# Altium PCB Smart-Car.PcbDoc (part 1 of 2)
Units mil, origin at the board's own origin, x right, y up, seen from the top; angles counter-clockwise.
Board outline 3864.45 x 1894.79 mil, 4 copper layers (Top Layer, Signal Layer 1, GND, Bottom Layer), stack 36.221 mil thick; 161 components, 132 nets, 578 pads, 430 vias.
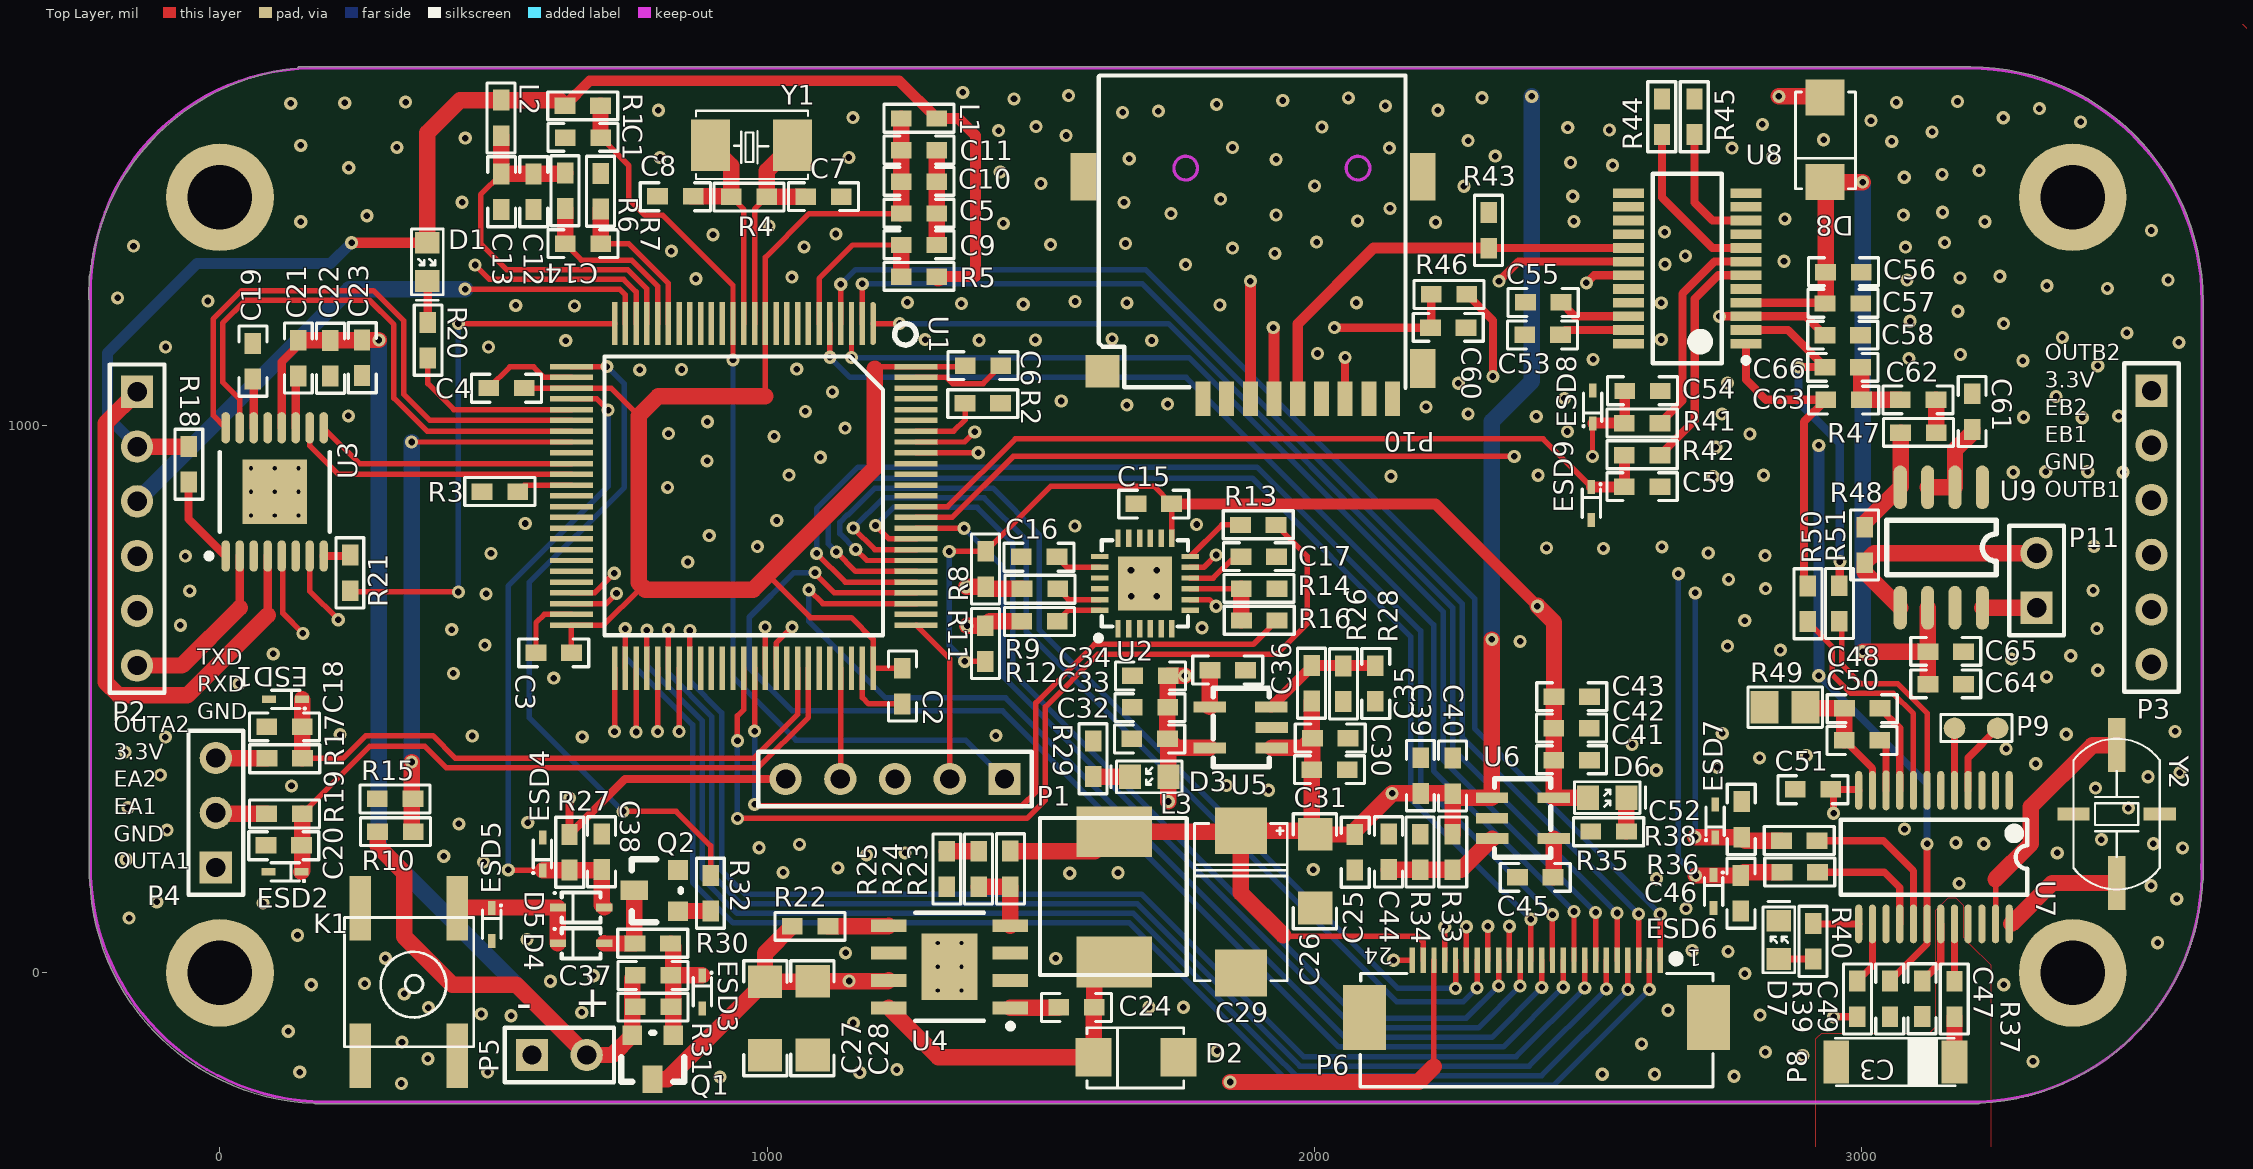
[diagram p0: Top Layer view]
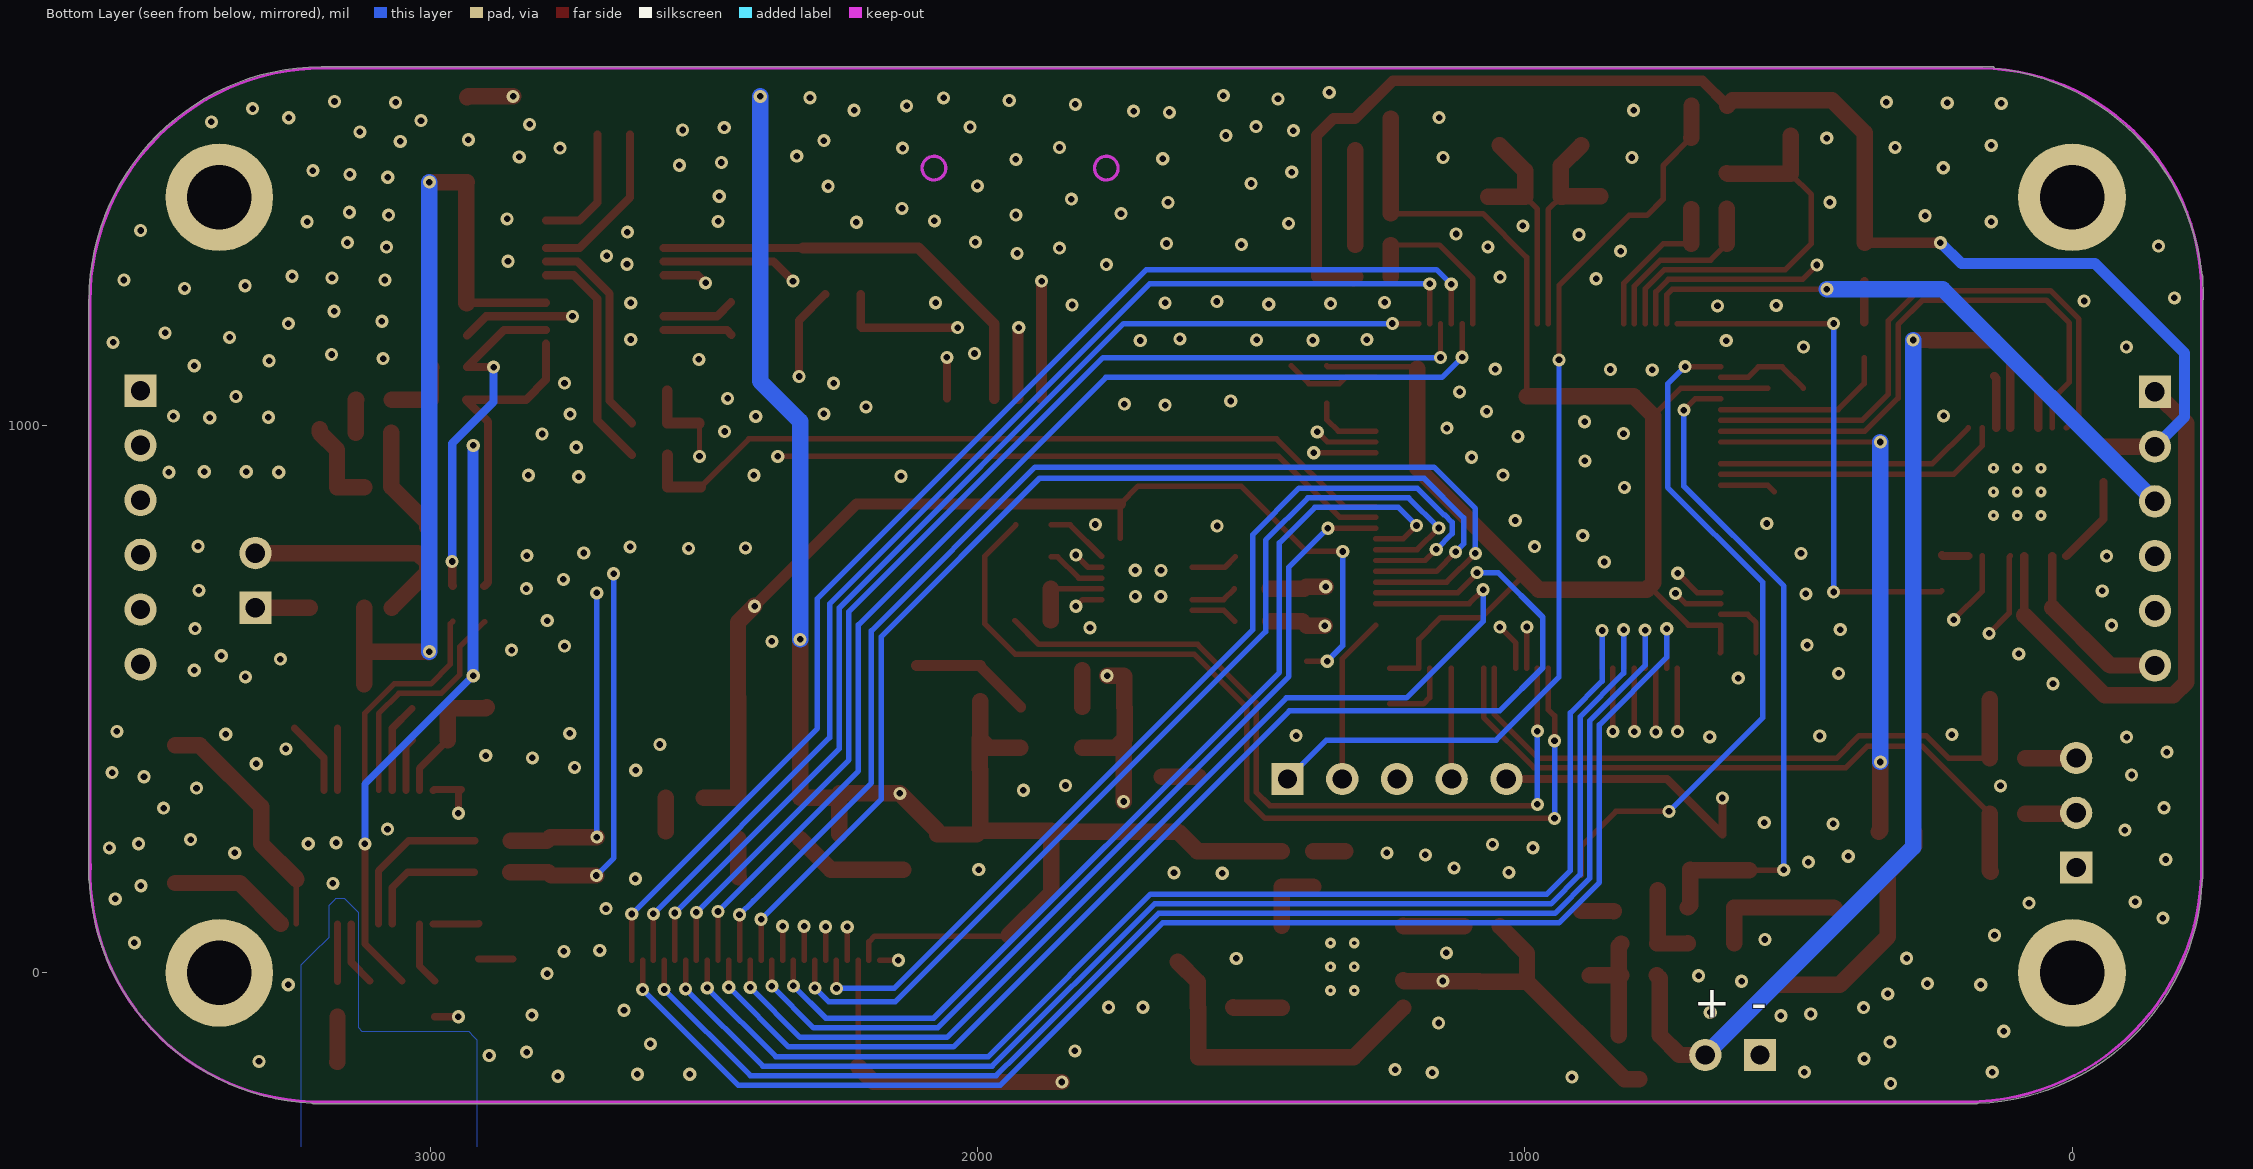
[diagram p1: Bottom Layer view, seen from below]
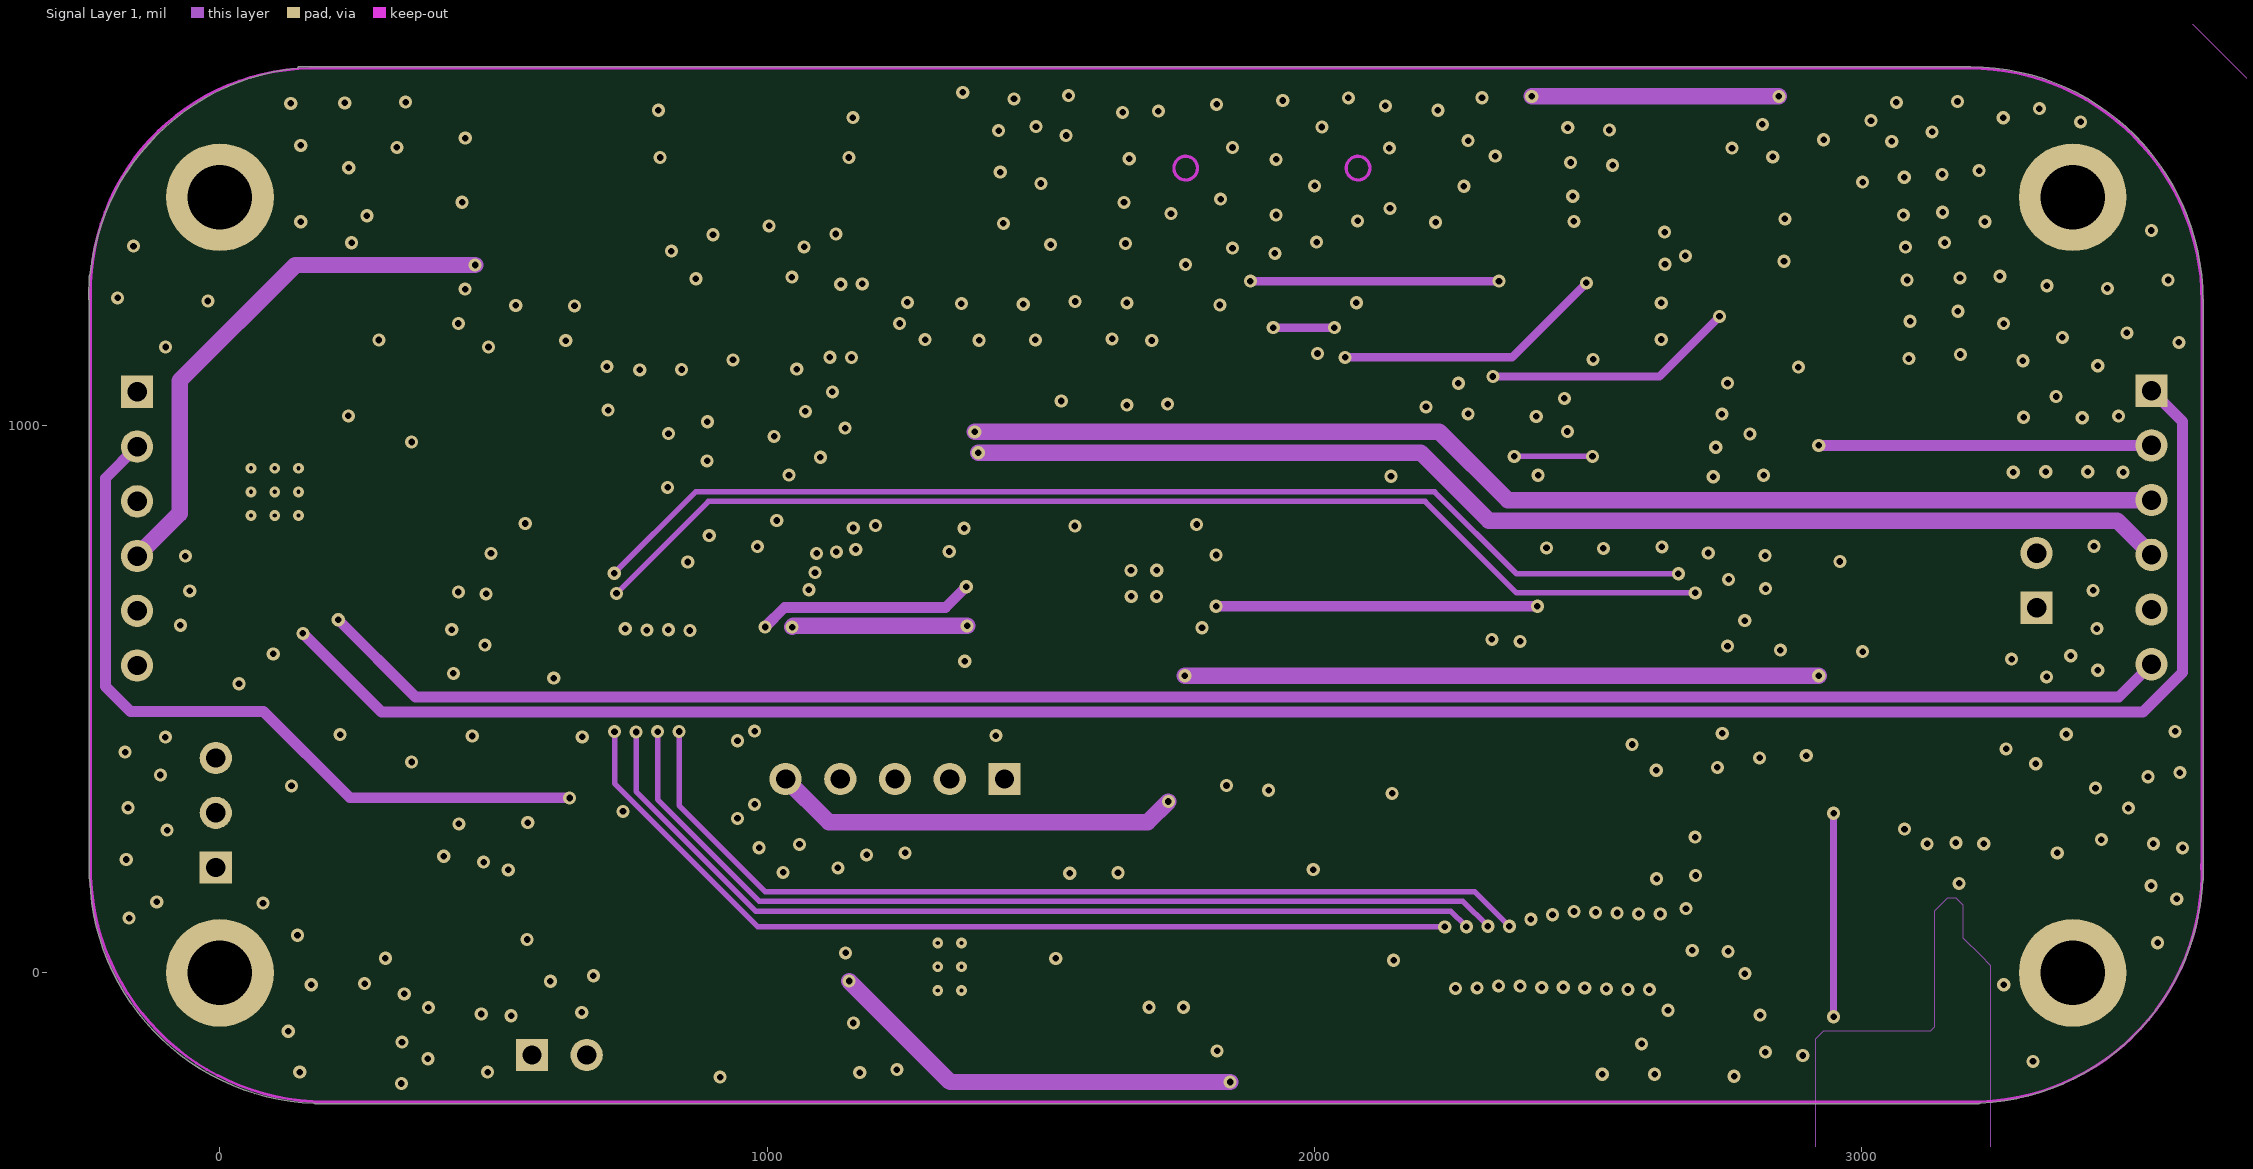
[diagram p2: Signal Layer 1]
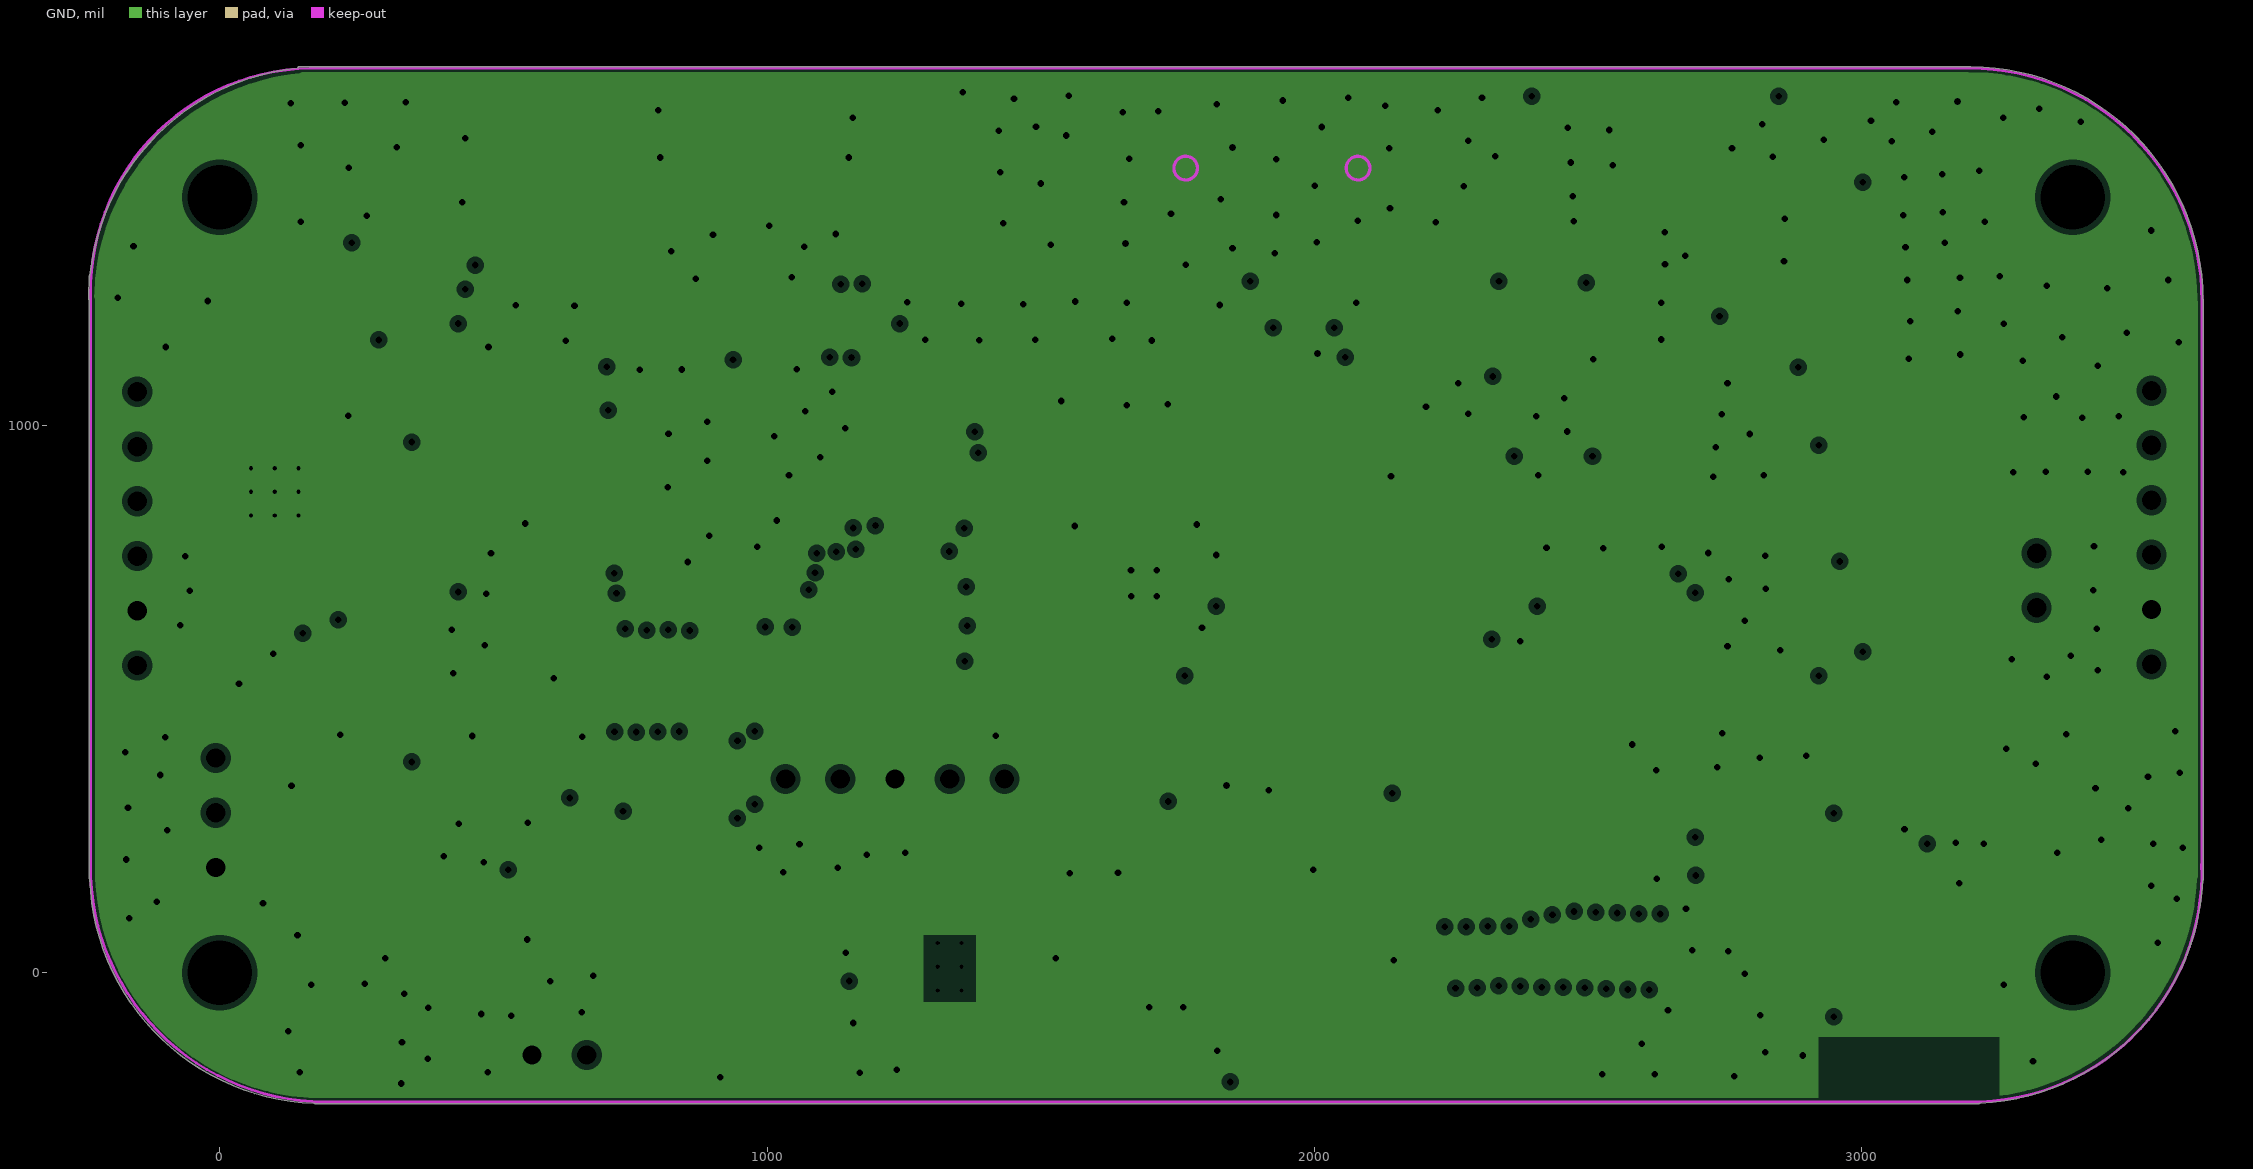
[diagram p3: GND, clearances drawn from the general rule]

## Layer stack, top to bottom
Top Solder: solder mask 1.575, Solder Resist, Dk 3.5
Top Layer: signal copper 7.874
Dielectric 1: core 1.575, FR-4, Dk 4.2
Signal Layer 1: signal copper 7.874
Dielectric 2: core 1.575, Dk 4.2
GND: plane copper 7.874, net GND
Dielectric 3: core 1.575, Dk 4.2
Bottom Layer: signal copper 7.874
Bottom Solder: solder mask 1.575, Solder Resist, Dk 3.5

## Board outline
-238.74,1229.75 cw(c-237.37,1231.87) -239.89,1231.88 cw(c185.73,1230.19) -238.74,1261.52 -238.74,1272.28 cw(c-236.22,1272.28) -237.59,1274.39 cw(c185.73,1230.19) 142.53,1653.61 cw(c145.05,1653.54) 145.05,1656.06 3197.51,1656.06 cw(c3197.51,1653.54) 3198.91,1655.63 cw(c3199.78,1653.28) 3199.79,1655.79 cw(c3198.1,1230.17) 3623.72,1230.88 cw(c3622.05,1229.01) 3624.56,1229.01 3624.56,171.54 cw(c3622.05,171.54) 3623.06,169.24 cw(c3197.83,187.36) 3216.19,-237.86 cw(c3214.28,-236.22) 3214.28,-238.74 173.28,-238.74 cw(c173.28,-236.22) 172.14,-238.46 cw(c187.46,186.88) -237.88,171.39 cw(c-236.22,173.28) -238.74,173.28

## Design rules (kind name [scope] priority, off if disabled: settings)
AssemblyTestPointUsage [All] p0: scope1count=1 scope1_0_kind=Board scope1_0_value=Board scope2count=1 scope2_0_kind=Board scope2_0_value=Board commentlength=0
AssemblyTestpoint [All] p0: scope1count=1 scope1_0_kind=Board scope1_0_value=Board scope2count=1 scope2_0_kind=Board scope2_0_value=Board commentlength=0
Clearance PVCC [All] p0: scope1count=1 scope1_0_kind=Net scope1_0_value=PVCC scope2count=1 scope2_0_kind=Net scope2_0_value=GND-WAVE commentlength=0 gap=20
Clearance [All] p0: scope1count=1 scope1_0_kind=Board scope1_0_value=Board scope2count=1 scope2_0_kind=Board scope2_0_value=Board commentlength=0 gap=7.5
Clearance PVCC [InNet('PVCC') vs InNet('GND-WAVE')] p1: gap=20 ignorepadtopadclearanceinfootprint=FALSE except(0: Arc-Hole Track-Hole SMDPad-Hole THPad-Hole Via-Hole Fill-Hole Poly-Hole Region-Hole Text-Hole)
Clearance [All] p2: gap=7.5 ignorepadtopadclearanceinfootprint=FALSE except(0: Arc-Hole Track-Hole SMDPad-Hole THPad-Hole Via-Hole Fill-Hole Poly-Hole Region-Hole Text-Hole)
ComponentClearance [All] p0: scope1count=1 scope1_0_kind=Board scope1_0_value=Board scope2count=1 scope2_0_kind=Board scope2_0_value=Board commentlength=0 gap=10 collisioncheckmode=3
DiffPairsRouting [All] p0: scope1count=1 scope1_0_kind=Board scope1_0_value=Board scope2count=1 scope2_0_kind=Board scope2_0_value=Board commentlength=0
FabricationTestPointUsage [All] p0: scope1count=1 scope1_0_kind=Board scope1_0_value=Board scope2count=1 scope2_0_kind=Board scope2_0_value=Board commentlength=0 valid=0 allowmultiple=FALSE
FabricationTestpoint [All] p0: scope1count=1 scope1_0_kind=Board scope1_0_value=Board scope2count=1 scope2_0_kind=Board scope2_0_value=Board commentlength=0 side=3 testpointundercomponent=TRUE minsize=40 maxsize=100 preferedsize=60 minholesize=0 maxholesize=40 preferedholesize=32 testpointgrid=1
FanoutControl Fanout_BGA [All] p0 off: scope1count=1 scope1_0_kind=Board scope1_0_value=Board scope2count=1 scope2_0_kind=Board scope2_0_value=Board commentlength=69 // Protel DXP Scope 1 Expression Was: IsBGA   Fanout_BGA (Default Rule)
FanoutControl Fanout_LCC [All] p0 off: scope1count=1 scope1_0_kind=Board scope1_0_value=Board scope2count=1 scope2_0_kind=Board scope2_0_value=Board commentlength=69 // Protel DXP Scope 1 Expression Was: IsLCC   Fanout_LCC (Default Rule)
FanoutControl Fanout_SOIC [All] p0 off: scope1count=1 scope1_0_kind=Board scope1_0_value=Board scope2count=1 scope2_0_kind=Board scope2_0_value=Board commentlength=71 // Protel DXP Scope 1 Expression Was: IsSOIC   Fanout_SOIC (Default Rule)
FanoutControl Fanout_Small [All] p0 off: scope1count=1 scope1_0_kind=Board scope1_0_value=Board scope2count=1 scope2_0_kind=Board scope2_0_value=Board commentlength=84 // Protel DXP Scope 1 Expression Was: (CompPinCount < 5)   Fanout_Small (Default Rule)
FanoutControl Fanout_Default [All] p0: scope1count=1 scope1_0_kind=Board scope1_0_value=Board scope2count=1 scope2_0_kind=Board scope2_0_value=Board commentlength=30 // Fanout_Default (Default Rule)
Height [All] p0: scope1count=1 scope1_0_kind=Board scope1_0_value=Board scope2count=1 scope2_0_kind=Board scope2_0_value=Board commentlength=0
HoleSize [All] p0: scope1count=1 scope1_0_kind=Board scope1_0_value=Board scope2count=1 scope2_0_kind=Board scope2_0_value=Board commentlength=0 absolutevalues=TRUE maxlimit=500 minlimit=1 maxpercent=80.000 minpercent=20.000
HoleSize [All] p1: absolutevalues=TRUE maxlimit=500 minlimit=1 maxpercent=80.000 minpercent=20.000
HoleToHoleClearance [All] p0: scope1count=1 scope1_0_kind=Board scope1_0_value=Board scope2count=1 scope2_0_kind=Board scope2_0_value=Board commentlength=0
LayerPairs [All] p0: scope1count=1 scope1_0_kind=Board scope1_0_value=Board scope2count=1 scope2_0_kind=Board scope2_0_value=Board commentlength=0 enforce=TRUE
MinimumSolderMaskSliver [All] p0: scope1count=1 scope1_0_kind=Board scope1_0_value=Board scope2count=1 scope2_0_kind=Board scope2_0_value=Board commentlength=0
MinimumSolderMaskSliver [All] p1: minsoldermaskwidth=0
NetAntennae [All] p0: scope1count=1 scope1_0_kind=Board scope1_0_value=Board scope2count=1 scope2_0_kind=Board scope2_0_value=Board commentlength=0
PasteMaskExpansion [All] p0: scope1count=1 scope1_0_kind=Board scope1_0_value=Board scope2count=1 scope2_0_kind=Board scope2_0_value=Board commentlength=0 expansion=0
PlaneClearance [All] p0: scope1count=1 scope1_0_kind=Board scope1_0_value=Board scope2count=1 scope2_0_kind=Board scope2_0_value=Board commentlength=0 clearance=10
PlaneClearance [All] p1: clearance=10
PlaneConnect [All] p0: scope1count=1 scope1_0_kind=Board scope1_0_value=Board scope2count=1 scope2_0_kind=Board scope2_0_value=Board commentlength=0 planeconnectstyle=Relief reliefexpansion=20 reliefentries=4 reliefconductorwidth=10 reliefairgap=10
PlaneConnect [All] p1: planeconnectstyle=Relief reliefexpansion=20 reliefentries=4 reliefconductorwidth=10 reliefairgap=10
PolygonConnect Via [All] p0 off: scope1count=1 scope1_0_kind=Board scope1_0_value=Board scope2count=1 scope2_0_kind=Board scope2_0_value=Board commentlength=44 connectstyle=Direct reliefconductorwidth=10 reliefentries=4 polygonreliefangle="90 Angle" // Protel DXP Scope 1 Expression Was: IsVia
PolygonConnect [All] p0: scope1count=1 scope1_0_kind=Board scope1_0_value=Board scope2count=1 scope2_0_kind=Board scope2_0_value=Board commentlength=0 connectstyle=Relief reliefconductorwidth=10 reliefentries=4 polygonreliefangle="90 Angle"
PolygonConnect Via [IsVia] p1: connectstyle=Direct reliefconductorwidth=10 reliefentries=4 polygonreliefangle="90 Angle" airgapwidth=10
PolygonConnect [All] p2: connectstyle=Relief reliefconductorwidth=10 reliefentries=4 polygonreliefangle="90 Angle" airgapwidth=10
RoutingCorners [All] p0: scope1count=1 scope1_0_kind=Board scope1_0_value=Board scope2count=1 scope2_0_kind=Board scope2_0_value=Board commentlength=0 cornerstyle=45-Degree minsetback=100 maxsetback=100
RoutingLayers [All] p0: scope1count=1 scope1_0_kind=Board scope1_0_value=Board scope2count=1 scope2_0_kind=Board scope2_0_value=Board commentlength=0 top layer=Automatic mid layer 1=Automatic bottom layer=Automatic
RoutingPriority [All] p0: scope1count=1 scope1_0_kind=Board scope1_0_value=Board scope2count=1 scope2_0_kind=Board scope2_0_value=Board commentlength=0
RoutingTopology [All] p0: scope1count=1 scope1_0_kind=Board scope1_0_value=Board scope2count=1 scope2_0_kind=Board scope2_0_value=Board commentlength=0 topology=Shortest
RoutingVias [All] p0: scope1count=1 scope1_0_kind=Board scope1_0_value=Board scope2count=1 scope2_0_kind=Board scope2_0_value=Board commentlength=0 holewidth=12 width=24 viastyle="Through Hole" minholewidth=12 minwidth=24 maxholewidth=500 maxwidth=1000
RoutingVias [All] p1: holewidth=12 width=24 viastyle="Through Hole" minholewidth=12 minwidth=24 maxholewidth=500 maxwidth=1000
ShortCircuit [All] p0: scope1count=1 scope1_0_kind=Board scope1_0_value=Board scope2count=1 scope2_0_kind=Board scope2_0_value=Board commentlength=0 allowed=TRUE
ShortCircuit [All] p1: allowed=TRUE
SilkToBoardRegionClearance [All] p0: scope1count=1 scope1_0_kind=Board scope1_0_value=Board scope2count=1 scope2_0_kind=Board scope2_0_value=Board commentlength=0
SilkToSilkClearance [All] p0: scope1count=1 scope1_0_kind=Board scope1_0_value=Board scope2count=1 scope2_0_kind=Board scope2_0_value=Board commentlength=0
SilkToSilkClearance [All] p1: silktosilkclearance=0
SilkToSolderMaskClearance [All] p0 off: scope1count=1 scope1_0_kind=Board scope1_0_value=Board scope2count=1 scope2_0_kind=Board scope2_0_value=Board commentlength=44 // Protel DXP Scope 1 Expression Was: IsPad
SilkToSolderMaskClearance [IsPad] p1: minsilkscreentomaskgap=0 clearancetoexposedcopper=TRUE
SolderMaskExpansion [All] p0: scope1count=1 scope1_0_kind=Board scope1_0_value=Board scope2count=1 scope2_0_kind=Board scope2_0_value=Board commentlength=0 expansion=4
SolderMaskExpansion [All] p1: expansion=4 istentingtop=FALSE
UnRoutedNet [All] p0: scope1count=1 scope1_0_kind=Board scope1_0_value=Board scope2count=1 scope2_0_kind=Board scope2_0_value=Board commentlength=0
UnpouredPolygon [All] p0: scope1count=1 scope1_0_kind=Board scope1_0_value=Board scope2count=1 scope2_0_kind=Board scope2_0_value=Board commentlength=0
Width [All] p0: scope1count=1 scope1_0_kind=Board scope1_0_value=Board scope2count=1 scope2_0_kind=Board scope2_0_value=Board commentlength=0 maxlimit=100 minlimit=9 preferedwidth=10
Width [All] p1: maxlimit=100 minlimit=9 preferedwidth=10
23 further rules are at their usual default settings.

## Classes and differential pairs
component class Voice: C53 C54 C55 C56 C57 C58 C59 C60 C61 C62 C63 C64 C65 C66 D8 ESD8 ESD9 P10 P11 R41 R42 R43 R44 R45 R46 R47 R48 R50 R51 U8 U9
component class KT1025A: C46 C47 C48 C49 C50 C51 C52 D7 ESD6 ESD7 P8 P9 R36 R37 R38 R39 R40 R49 U7 Y2
component class Extend: P6
component class MCU: C1 C2 C3 C4 C5 C6 C7 C8 C9 C10 C11 C12 C13 C14 L1 L2 P1 R1 R2 R3 R4 R5 R6 R7 U1 Y1
component class Module: C15 C16 C17 C18 C19 C20 C21 C22 C23 D1 ESD1 ESD2 P2 P3 P4 R8 R9 R10 R11 R12 R13 R14 R15 R16 R17 R18 R19 R20 R21 U2 U3
component class Power: C24 C25 C26 C27 C28 C29 C30 C31 C32 C33 C34 C35 C36 C37 C38 C39 C40 C41 C42 C43 C44 C45 D2 D3 D4 D5 D6 ESD3 ESD4 ESD5 K1 L3 P5 Q1 Q2 R22 R23 R24 R25 R26 R27 R28 R29 R30 R31 R32 R33 R34 R35 U4 U5 U6

## Components (designator, comment, footprint, x,y, rotation, side; value= is the part's Value field where it differs from the comment)
C1 "0.1μF" 0603C 663.48,1526.28 r180 top
C2 "0.1μF" 0603C 1246.98,524.08 r90 top
C3 "0.1μF" 0603C 610.08,585.28 r0 top
C4 "0.1μF" 0603C 523.68,1068.78 r0 top
C5 "0.1μF" 0603C 1277.58,1387.68 r180 top
C6 "0.1μF" 0603C 1394.38,1109.18 r180 top
C7 "20pF" 0603C 1102.88,1418.08 r180 top
C8 "20pF" 0603C 832.28,1418.88 r0 top
C9 "0.1μF" 0603C 1277.58,1330.18 r180 top
C10 "10μF" 0603C 1277.58,1446.08 r180 top
C11 "0.1μF" 0603C 1277.58,1503.38 r180 top
C12 "10μF" 0603C 572.98,1427.58 r90 top
C13 "0.1μF" 0603C 514.28,1427.58 r90 top
C14 "0.1μF" 0603C 663.58,1332.08 r180 top
C15 "0.1μF" 0603C 1706.48,857.04 r0 top
C16 "10μF" 0603C 1496.98,760.14 r0 top
C17 "0.1μF" 0603C 1898.18,760.24 r180 top
C18 "39pF" 0603C 117.9,450.1 r0 top
C19 "2.2μF" 0603C 59.8,1117.89 r90 top
C20 "39pF" 0603C 116.6,232.9 r0 top
C21 "10nF" 0603C 142.8,1123.5 r90 top
C22 "10μF" 0603C 201.4,1123.29 r90 top
C23 "0.1μF" 0603C 259.6,1124.09 r90 top
C24 "0.01μF" 0603C 1565.38,-62.92 r0 top
C25 "0.1μF" 0603C 2074.18,220.38 r90 top
C26 "10μF" 1206C 2001.28,118.63 r90 top
C27 "4.7μF" 1206C 996.08,-16.02 r270 top
C28 "4.7μF" 1206C 1083.08,-149.87 r90 top
C29 "100μF" D7343C 1865.68,260.01 r270 top
C30 "10μF" 0603C 2028.98,428.58 r180 top
C31 "470pf" 0603C 2027.78,370.98 r180 top
C32 "10μF" 0603C 1698.98,427.78 r0 top
C33 "10μF" 0603C 1699.68,485.18 r0 top
C34 "470pf" 0603C 1700.38,542.98 r0 top
C35 "0.1μF" 0603C 2111.58,528.88 r90 top
C36 "0.01μF" 0603C 1841.6,552.9 r180 top
C37 "100nf" 0603C 791.38,-4.42 r0 top
C38 "10nF" 0603C 697.78,221.38 r270 top
C39 "10μF" 0603C 2194.28,360.48 r270 top
C40 "470pf" 0603C 2252.88,359.98 r270 top
C41 "10μF" 0603C 2470.08,388.88 r180 top
C42 "10μF" 0603C 2469.88,446.88 r180 top
C43 "470pf" 0603C 2470.38,504.38 r180 top
C44 "0.1μF" 0603C 2135.98,221.18 r270 top
C45 "0.01μF" 0603C 2403.78,175.08 r0 top
C46 "39pF" 0603C 2779.1,145.5 r90 top
C47 "1μF" 0603C 3110.8,-47.2 r270 top
C48 "1μF" 0603C 3001.2,483.3 r0 top
C49 "1μF" 0603C 3052,-47.6 r270 top
C50 "1μF" 0603C 3000.8,425.3 r0 top
C51 "1μF" 0603C 2911.2,335.2 r0 top
C52 "39pF" 0603C 2780.7,280.5 r270 top
C53 "1μF" 0603C 2417.1,1166.1 r0 top
C54 "39pF" 0603C 2599.7,1063.4 r180 top
C55 "1μF" 0603C 2418.1,1225.5 r0 top
C56 "0.1μF" 0603C 2966.8,1280.7 r180 top
C57 "1μF" 0603C 2965.9,1223.2 r180 top
C58 "1μF" 0603C 2965.6,1165 r180 top
C59 "39pF" 0603C 2599,888.1 r180 top
C60 "1μF" 0603C 2244.7,1179.1 r180 top
C61 "1μF" 0603C 3202.6,1025.7 r270 top
C62 "0.15μF" 0603C 3103.3,1047.6 r0 top
C63 "1μF" 0603C 2967.2,1047.2 r0 top
C64 "1μF" 0603C 3153.9,527.6 r180 top
C65 "10μF" 0603C 3153.9,587 r180 top
C66 "1μF" 0603C 2965.8,1107 r0 top
D1 "蓝色LED" 0603LED 379.2,1334.3 r270 top
D2 "1N5822 SS34" SMA-small 1751.32,-154.3 r180 top
D3 "绿色LED" 0603LED 1733.28,358.38 r180 top
D4 "1N4148" SOD323 659.88,53.78 r180 top
D5 "1N4148" SOD323 660.08,119.48 r180 top
D6 "红色LED" 0603LED 2500.28,320.38 r0 top
D7 "蓝色LED" 0603LED 2848.9,25.3 r90 top
D8 "1N5819 SS14" SMA-small 2933.1,1599.8 r270 top
ESD1 "ESD5Z5.0T1G" SOD523 89.94,500.2 r0 top
ESD2 "ESD5Z5.0T1G" SOD523 88.74,184.9 r0 top
ESD3 "ESD5Z6.0T1G" SOD523 881.28,-64.78 r90 top
ESD4 "ESD5Z3.3T1G" SOD523 589.68,247.53 r270 top
ESD5 "ESD5Z6.0T1G" SOD523 496.48,58.28 r90 top
ESD6 "ESD5Z5.0T1G" SOD523 2729.4,118.44 r90 top
ESD7 "ESD5Z5.0T1G" SOD523 2732.7,307.66 r270 top
ESD8 "ESD5Z5.0T1G" SOD523 2508.8,1064.2 r270 top
ESD9 "ESD5Z5.0T1G" SOD523 2506,827.8 r90 top
K1 "轻触按键贴片 6*6*5" "轻触按键贴片 6*6*5" 425.37,-151.47 r270 top
L1 "BEAD-220/100MHZ" 0603R 1277.58,1561.28 r180 top
L2 "BEAD-220/100MHZ" 0603R 514.28,1562.38 r270 top
L3 "10μH_4A_7*7*3" "7*7*3mm - 06030" 1633.98,19.98 r90 top
P1 "Header 5" HDR1X5 1433.68,354.38 r180 top
P2 "Header 6" HDR1X6 -151.4,1061.7 r270 top
P3 "Header 6" HDR1X6 3529.9,1064 r270 top
P4 "Header 3" HDR1X3 -7.58,192.58 r90 top
P5 "Header 2" HDR1X2 570.28,-150.12 r0 top
P6 "FPC-24P-0.5mm" FPC24-0.5mm 2631.99,23 r180 top locked
P8 "CA-C03" ANT 3170.14,-162.8 r180 top
P9 "预留测试口-2Pin" "预留测试口 2Pin" 3169.8,447 r0 top
P10 "Mini SD" TF-tan 1796.39,1049.4 r180 top locked
P11 "Header 2" HDR1X2 3319.8,667.1 r90 top
Q1 "SI2323DS" SOT-23 828.58,-114.12 r180 top
Q2 "MMBT3904" SOT-23 837.18,112.88 r90 top
R1 "10K ohm" 0603R 662.98,1584.98 r0 top
R2 "10K ohm" 0603R 1394.1,1040.7 r0 top
R3 "10K ohm" 0603R 511.6,879.1 r180 top
R4 "1M ohm" 0603R 966.78,1418.08 r0 top
R5 "0 ohm" 0603R 1277.58,1272.38 r180 top
R6 "0 ohm" 0603R 631.08,1429.18 r270 top
R7 "0 ohm" 0603R 695.88,1428.48 r270 top
R8 "4.7K ohm" 0603R 1399.58,738.14 r270 top
R9 "120ohm" 0603R 1498.48,701.64 r0 top
R10 "200K ohm" 0603R 320.7,257.6 r180 top
R11 "4.7K ohm" 0603R 1398.48,601.74 r90 top
R12 "120ohm" 0603R 1497.78,642.64 r0 top
R13 "120ohm" 0603R 1897.58,818.54 r180 top
R14 "10K ohm" 0603R 1898.98,702.24 r180 top
R15 "68K ohm" 0603R 320.1,318.4 r0 top
R16 "120ohm" 0603R 1899.28,643.94 r180 top
R17 "100ohm" 0603R 118.3,391.9 r0 top
R18 "10K ohm" 0603R -57.2,929.5 r90 top
R19 "100ohm" 0603R 117.8,290.7 r0 top
R20 "1K ohm" 0603R 379.9,1156.3 r90 top
R21 "10K ohm" 0603R 237.9,731 r270 top
R22 "10K ohm" 0603R 1078.48,85.48 r0 top
R23 "10K ohm" 0603R 1444.28,190.08 r90 top
R24 "3K ohm" 0603R 1386.78,189.78 r270 top
R25 "240ohm" 0603R 1327.88,189.78 r90 top
R26 "100Kohm" 0603R 1995.18,529.18 r270 top
R27 "10K ohm" 0603R 638.88,220.48 r90 top
R28 "330K ohm" 0603R 2052.88,528.18 r90 top
R29 "1K ohm" 0603R 1595.88,391.28 r270 top
R30 "10K ohm" 0603R 790.98,53.68 r180 top
R31 "100Kohm" 0603R 791.58,-62.02 r0 top
R32 "1K ohm" 0603R 896.78,145.58 r270 top
R33 "100Kohm" 0603R 2252.38,220.78 r90 top
R34 "330K ohm" 0603R 2193.58,220.78 r270 top
R35 "1K ohm" 0603R 2537.78,258.38 r0 top
R36 "100ohm" 0603R 2886.9,183.8 r180 top
R37 "0 ohm" 0603R 3169.8,-47.7 r270 top
R38 "100ohm" 0603R 2886,241.5 r180 top
R39 "22K ohm" 0603R 2992.1,-47.6 r90 top
R40 "1K ohm" 0603R 2911.7,57.6 r270 top
R41 "100ohm" 0603R 2599,1004.5 r180 top
R42 "100ohm" 0603R 2599,946.3 r180 top
R43 "3.3K ohm" 0603R 2318.8,1356.9 r270 top
R44 "3.3K ohm" 0603R 2635.3,1564.5 r270 top
R45 "3.3K ohm" 0603R 2694.7,1564.5 r270 top
R46 "4.7ohm" 0603R 2246.1,1240.2 r0 top
R47 "10K ohm" 0603R 3103.9,987.3 r180 top
R48 "39K ohm" 0603R 3006,781.9 r270 top
R49 "0 ohm" 0805R 2822.5,485.3 r0 top
R50 "0 ohm" 0603R 2901.6,674.5 r90 top
R51 "0 ohm" 0603R 2959.1,675 r90 top
U1 "STM32F103VET6" LQFP100 965.18,879.58 r270 top locked
U2 "MPU6050" QFN24 1690.48,711.74 r90 top locked
U3 "DRV8833PWPR" TSSOP16 100.1,878.99 r90 top
U4 "TPS5430DDAR" SOIC8-PAD 1333.38,11.18 r180 top
U5 "TP2019-3.3YN5" SOT-23-5 1921.99,411.1 r90 top
U6 "TP2019-3.3YN5" SOT-23-5 2324.49,320.18 r270 top
U7 "KT1025A" SSOP24 3269.8,333.5 r270 top
U8 "BY8002-24SS" QSOP-24N 2252.25,1837.3 r180 top
U9 "MIX2002" "SOP8 - NO-HP" 3220.7,887.3 r270 top
Y1 "XTAL_8MHz_5032" 5032 896.68,1512.58 r0 top
Y2 "M49SMD-24M" M49S 3466.2,290.2 r90 top

## Footprints (in the part's own frame and the unit in brackets; to place one, negate y for a bottom-side part, rotate by r counter-clockwise, add the part's x,y. Pads: shape width x height; smd on the part's side, far side on the other; paste and mask are expansions set on the pad)
"7*7*3mm - 06030" [mm]
  rect 2.35x3.5 smd: 1(0,0) 2(6.05,0)
  silkscreen extent -0.61,-3.37 6.68,3.44
0603C [mil]
  rect 38x30 smd: 1(-32.5,0) 2(32.5,0)
  silkscreen extent -64,-26 64,25
0603LED [mil]
  rect 40x45 smd: 1(0,0) 2(70,0)
  silkscreen extent -25,-29 105,29
0603R [mil]
  rect 38x30 smd: 1(-32.5,0) 2(32.5,0)
  silkscreen extent -64,-26 64,25
0805R [mm]
  rect 1.3x1.5 smd: 1(0,0) 2(1.9,0)
  silkscreen extent -0.76,-0.94 2.69,0.94
1206C [mm]
  rect 1.52x1.6 smd: 1(0,0) 2(3.42,0)
  silkscreen extent -0.97,-0.99 4.37,1.02
5032 [mm]
  rect 1.8x2.4 smd: 1(0,0) 2(3.8,0)
  silkscreen extent -0.69,-1.57 4.51,1.6
ANT [mm]
  rect 1.2x2 smd: 1(0,0) 2(5.5,0)
  silkscreen extent -0.01,-1.1 5.54,1.1
D7343C [mm]
  rect 2.16x2.41 smd: 1(0,0) 2(6.61,0)
  silkscreen extent -0.33,-2.15 6.97,2.15
FPC24-0.5mm [mm]
  rect 0.25x1.2 smd: 1(0,0) 2(0.5,0) 3(1,0) 4(1.5,0) 5(2,0) 6(2.5,0) 7(3,0) 8(3.5,0) 9(4,0) 10(4.5,0) 11(5,0) 12(5.5,0) 13(6,0) 14(6.5,0) 15(7,0) 16(7.5,0) 17(8,0) 18(8.5,0) 19(9,0) 20(9.5,0) 21(10,0) 22(10.5,0) 23(11,0) 24(11.5,0)
  rect 2x3 smd: A(-2.25,2.652) B(13.725,2.652)
  silkscreen extent -2.45,-0.25 13.92,5.87
HDR1X2 [mm] "Connector; Header; 2 Position"
  rect 1.5x1.5 hole 0.9: 1(0,0)
  round 1.5 hole 0.9: 2(2.54,0)
  silkscreen extent -1.27,-1.27 3.81,1.27
HDR1X3 [mm] "Connector; Header; 3 Position"
  rect 1.5x1.5 hole 0.9: 1(0,0)
  round 1.5 hole 0.9: 2(2.54,0) 3(5.08,0)
  silkscreen extent -1.27,-1.27 6.35,1.27
HDR1X5 [mm] "Connector; Header; 5 Position"
  rect 1.5x1.5 hole 0.9: 1(0,0)
  round 1.5 hole 0.9: 2(2.54,0) 3(5.08,0) 4(7.62,0) 5(10.16,0)
  silkscreen extent -1.27,-1.27 11.43,1.27
HDR1X6 [mm] "Connector; Header; 6 Position"
  rect 1.5x1.5 hole 0.9: 1(0,0)
  round 1.5 hole 0.9: 2(2.54,0) 3(5.08,0) 4(7.62,0) 5(10.16,0) 6(12.7,0)
  silkscreen extent -1.27,-1.27 13.97,1.27
LQFP100 [mm]
  oval 2x0.254 smd: 1(-7.8,5.8)
  rect 2x0.254 smd: 2(-7.8,5.3) 3(-7.8,4.8) 4(-7.8,4.3) 5(-7.8,3.8) 6(-7.8,3.3) 7(-7.8,2.8) 8(-7.8,2.3) 9(-7.8,1.8) 10(-7.8,1.3) 11(-7.8,0.8) 12(-7.8,0.3) 13(-7.8,-0.2) 14(-7.8,-0.7) 15(-7.8,-1.2) 16(-7.8,-1.7) 17(-7.8,-2.2) 18(-7.8,-2.7) 19(-7.8,-3.2) 20(-7.8,-3.7) 21(-7.8,-4.2) 22(-7.8,-4.7) 23(-7.8,-5.2) 24(-7.8,-5.7) 25(-7.8,-6.2) 51(8.2,-6.2) 52(8.2,-5.7) 53(8.2,-5.2) 54(8.2,-4.7) 55(8.2,-4.2) 56(8.2,-3.7) 57(8.2,-3.2) 58(8.2,-2.7) 59(8.2,-2.2) 60(8.2,-1.7) 61(8.2,-1.2) 62(8.2,-0.7) 63(8.2,-0.2) 64(8.2,0.3) 65(8.2,0.8) 66(8.2,1.3) 67(8.2,1.8) 68(8.2,2.3) 69(8.2,2.8) 70(8.2,3.3) 71(8.2,3.8) 72(8.2,4.3) 73(8.2,4.8) 74(8.2,5.3) 75(8.2,5.8)
  rect 0.254x2 smd: 26(-5.8,-8.2) 27(-5.3,-8.2) 28(-4.8,-8.2) 29(-4.3,-8.2) 30(-3.8,-8.2) 31(-3.3,-8.2) 32(-2.8,-8.2) 33(-2.3,-8.2) 34(-1.8,-8.2) 35(-1.3,-8.2) 36(-0.8,-8.2) 37(-0.3,-8.2) 38(0.2,-8.2) 39(0.7,-8.2) 40(1.2,-8.2) 41(1.7,-8.2) 42(2.2,-8.2) 43(2.7,-8.2) 44(3.2,-8.2) 45(3.7,-8.2) 46(4.2,-8.2) 47(4.7,-8.2) 48(5.2,-8.2) 49(5.7,-8.2) 50(6.2,-8.2) 76(6.2,7.8) 77(5.7,7.8) 78(5.2,7.8) 79(4.7,7.8) 80(4.2,7.8) 81(3.7,7.8) 82(3.2,7.8) 83(2.7,7.8) 84(2.2,7.8) 85(1.7,7.8) 86(1.2,7.8) 87(0.7,7.8) 88(0.2,7.8) 89(-0.3,7.8) 90(-0.8,7.8) 91(-1.3,7.8) 92(-1.8,7.8) 93(-2.3,7.8) 94(-2.8,7.8) 95(-3.3,7.8) 96(-3.8,7.8) 97(-4.3,7.8) 98(-4.8,7.8) 99(-5.3,7.8) 100(-5.8,7.8)
  silkscreen extent -7.8,-6.66 6.66,7.8
M49S [mm]
  rect 2.5x0.8 smd: 1(3.2,0) 2(-3.2,0)
  rect 0.6x1.5 smd: 3(0,-2) 4(0,2)
  silkscreen extent -3.5,-2 3.5,2
QFN24 [mm]
  rect 0.8x0.25 smd: 1(-2.101,1.25) 2(-2.101,0.75) 3(-2.101,0.25) 4(-2.101,-0.25) 5(-2.101,-0.75) 6(-2.101,-1.25) 13(2.101,-1.25) 14(2.101,-0.75) 15(2.101,-0.25) 16(2.101,0.25) 17(2.101,0.75) 18(2.101,1.25)
  rect 0.25x0.8 smd: 7(-1.25,-2.101) 8(-0.75,-2.101) 9(-0.25,-2.101) 10(0.25,-2.101) 11(0.75,-2.101) 12(1.25,-2.101) 19(1.25,2.101) 20(0.75,2.101) 21(0.25,2.101) 22(-0.25,2.101) 23(-0.75,2.101) 24(-1.25,2.101)
  rect 2.5x2.5 smd: 25(0,0)
  silkscreen extent -2.66,-2 2,2.28
QSOP-24N [mm] "SOP, 24-Leads, Body 8.65x3.90mm, Pitch 0.64mm, IPC Medium Density"
  rect 1.45x0.45 smd: 1(-13.625,17.462) 2(-13.625,16.827) 3(-13.625,16.192) 4(-13.625,15.557) 5(-13.625,14.922) 6(-13.625,14.287) 7(-13.625,13.652) 8(-13.625,13.017) 9(-13.625,12.382) 10(-13.625,11.747) 11(-13.625,11.112) 12(-13.625,10.477) 13(-8.175,10.477) 14(-8.175,11.112) 15(-8.175,11.747) 16(-8.175,12.382) 17(-8.175,13.018) 18(-8.175,13.652) 19(-8.175,14.287) 20(-8.175,14.922) 21(-8.175,15.557) 22(-8.175,16.192) 23(-8.175,16.828) 24(-8.175,17.462)
  silkscreen extent -13.75,9.57 -9.3,18.37
SMA-small [mm]
  rect 1.67x1.8 smd: 1(0,0) 2(3.93,0)
  silkscreen extent -0.26,-1.37 4.24,1.42
SOD323 [mm]
  rect 0.75x0.35 smd: 1(-1.075,0) 2(1.075,0)
  silkscreen extent -0.9,-0.72 1.27,0.7
SOD523 [mm]
  rect 0.65x0.35 smd: 1(0,0) 2(1.525,0)
  silkscreen extent 0.12,-0.48 1.7,0.42
SOIC8-PAD [mm]
  rect 1.65x0.6 smd: 1(-2.825,1.905) 2(-2.825,0.635) 3(-2.825,-0.635) 4(-2.825,-1.905) 5(2.825,-1.905) 6(2.825,-0.635) 7(2.825,0.635) 8(2.825,1.905)
  rect 2.6x3.1 smd: 9(0,0)
  silkscreen extent -2.95,-2.5 1.6,2.88
"SOP8 - NO-HP" [mil]
  oval 80x24 smd: 1(0,0) 2(0,-50) 3(0,-100) 4(0,-150) 5(220,-150) 6(220,-100) 7(220,-50) 8(220,0)
  silkscreen extent 60,-175 160,25
SOT-23 [mil]
  rect 36x36 smd: 1(0,0) 3(75,0)
  rect 36x50 smd: 2(38,80)
  silkscreen extent -20,-5 95,85
SOT-23-5 [mm]
  rect 0.5x1.5 smd: 1(0,0) 2(0.95,0) 3(1.9,0.02) 4(1.9,2.87) 5(0,2.87)
  silkscreen extent -0.88,0.12 2.77,2.72
SSOP24 [mm]
  oval 1.8x0.33 smd: 1(0,0) 2(0,-0.635) 3(0,-1.27) 4(0,-1.905) 5(0,-2.54) 6(0,-3.175) 7(0,-3.81) 8(0,-4.445) 9(0,-5.08) 11(0,-6.35) 12(0,-6.985) 13(6.2,-6.985) 14(6.2,-6.35) 15(6.2,-5.715) 16(6.2,-5.08) 17(6.2,-4.445) 18(6.2,-3.81) 19(6.2,-3.175) 20(6.2,-2.54) 21(6.2,-1.905) 22(6.2,-1.27) 23(6.2,-0.635) 24(6.2,0)
  oval 1.85x0.33 smd: 10(0,-5.715)
  silkscreen extent 1.36,-7.82 4.84,0.84
TF-tan [mm]
  rect 1.2x1.8 smd: 0(-10.2,-1.397)
  rect 1.2x2.2 smd: 0(-10.2,-10.3) 0(5.551,-10.3)
  rect 1.6x1.5 smd: 0(4.662,-1.27)
  rect 0.7x1.6 smd: 1(0,0) 2(-1.1,0) 3(-2.2,0) 4(-3.3,0) 5(-4.4,0) 6(-5.5,0) 7(-6.6,0) 8(-7.7,0) 9(-8.8,0)
  Keep-Out Layer circle w0.152: c0.8,-10.7 r0.55
  Keep-Out Layer circle w0.152: c-7.2,-10.7 r0.55
  silkscreen extent -9.4,-15 4.84,-0.5
TSSOP16 [mm]
  oval 1.45x0.4 smd: 1(-2.975,2.275) 2(-2.975,1.625) 3(-2.975,0.975) 4(-2.975,0.325) 5(-2.975,-0.325) 6(-2.975,-0.975) 7(-2.975,-1.625) 8(-2.975,-2.275) 9(2.975,-2.275) 10(2.975,-1.625) 11(2.975,-0.975) 12(2.975,-0.325) 13(2.975,0.325) 14(2.975,0.975) 15(2.975,1.625) 16(2.975,2.275)
  rect 3x3 smd: 17(0,0)
  silkscreen extent -3.1,-2.55 1.85,3.17
"轻触按键贴片 6*6*5" [mm]
  rect 3x1 smd mask+0: 1(-6.841,0.215) 2(0,0.215) 3(-6.841,-4.285) 4(0,-4.285)
  silkscreen extent -6.42,-5.03 -0.42,0.97
"预留测试口 2Pin" [mm]
  round 1 smd: 1(0,0) 2(2,0)
  silkscreen extent -0.64,-0.61 2.67,0.64

## Part data
C1 C2 C3 C4 C5 C6 C9 C11 C13 C14 C15 C17 C23 C25 C35 C44 C56: library part Cap_0.1μF_50V_0603, "0.1μF_50V,X7R,±5%"
C7 C8: library part Cap_20pF_50V_0603, "20pF_50V,CH,±5%"
C10 C12 C16 C22 C30 C32 C33 C39 C41 C42 C65: library part Cap_10μF_35V_0603, "10μF_35V,X5R,20%"
C18 C20 C46 C52 C54 C59: library part Cap_39pF_50V_0603, "39pF_50V,C0G (EIA),±1%"
C19: library part Cap_2.2uF_35V_0603, "2.2μF_35V,±10%"
C21: library part Cap_10nF_50V_0603, "10nF_50V,SL_0603,±5%"
C24 C36 C45: library part Cap_0.01μF_50V_0603, "0.01μF_50V,C0G,5%"
C26: library part Cap_10μF_10V_1206, "10μF_10V,10%"
C27 C28: library part Cap_4.7μF_35V_1206, "4.7μF_35VJB,±10%"
C29: library part Cap_100μF_16V_D7343, "100μF_16V"
C31 C34 C40 C43: library part Cap_470pf_50V_0603, "470pf_50V,X7R,10%"
C37: library part Cap_100nf_50V_0603, "100nf_50V,X5R,10%"
C38: library part Cap_10nF_16V_0603, "10nF/16V,0603"
C47 C48 C49 C50 C51 C53 C55 C57 C58 C60 C61 C63 C64 C66: library part Cap_1μF_50V_0603, "1μF_50V,X5R,±10%"
C62: library part Cap_0.15μF_50V_0603, "0.15μF_50V,X7R,±5%"
D2: library part "1N5822 SS34_SMA"
D3 D6: library part 蓝色LED, "蓝色LED"
D4 D5: library part 1N4148WS_SOD323, "1N4148WS"
D8: library part "1N5819 SS14_SMA"
ESD1 ESD2 ESD6 ESD7 ESD8 ESD9: library part ESD5Z5.0T1G_SOD523
ESD3 ESD5: library part ESD5Z6.0T1G_SOD523
ESD4: library part ESD5Z3.3T1G_SOD523
L1 L2: library part BEAD-220/100MHZ_0603
L3: "10μH_4A"
P1: "Header, 5-Pin"
P2 P3: "Header, 6-Pin"
P4: "Header, 3-Pin"
P5 P11: "Header, 2-Pin"
P6: library part FPC-24-0.5mm
R1 R2 R3 R14 R18 R21 R22 R23 R27 R30 R47: library part "Res_10K ohm_0603", "10K ohm,1%"
R4: library part "Res_1M ohm_0603", "1M ohm,1%"
R5 R6 R7 R37 R50 R51: library part "Res_0 ohm_0603", "0 ohm,5%"
R8 R11: library part "Res_4.7K ohm_0603", "4.7K ohm,1%"
R9 R12 R13 R16: library part Res_120ohm_0603, "120 ohm_5%"
R10: library part "Res_200K ohm_0603", "200K ohm,1%"
R15: library part "Res_68K ohm_0603", "68K ohm,1%"
R17 R19 R36 R38 R41 R42: library part Res_100ohm_0603, "100 ohm_5%"
R20 R29 R32 R35 R40: library part "Res_1K ohm_0603", "1K ohm,1%"
R24: library part "Res_3K ohm_0603", "3K ohm,1%"
R25: library part Res_240ohm_0603, "240ohm,1%"
R26 R33: library part Res_100Kohm_0603, "100K ohm_1%"
R28 R34: library part "Res_330K ohm_0603", "330K ohm,1%"
R31: library part Res_100Kohm_0603, "100K ohm_5%"
R39: library part "Res_22K ohm_0603", "22K ohm,1%"
R43 R44 R45: library part "Res_3.3K ohm_0603", "3.3K ohm,1%"
R46: library part Res_4.7ohm_0603, "4.7ohm,1%"
R48: library part "Res_39K ohm_0603", "39K ohm,1%"
R49: library part "Res_0 ohm_0805", "0 ohm,5%"
Y1: "XTAL_8MHz"
Y2: library part M49SMD-24M-10ppm

## Free pads (board coordinates)
  round 196.85 hole 118.11: 0(0,0) 0(0,1417.32) 0(3385.83,0) 0(3385.83,1417.32)

## Via types
v1: diameter 24, hole 12, Top Layer to Bottom Layer, tented both sides, 415 vias
v2: diameter 19.68, hole 7.87, Top Layer to Bottom Layer, tented both sides, 15 vias

## Nets (pads, with @x,y where several pads share a name; then routed paths per layer and width w, separated by ;. In a path a pad name is that pad's centre, name@x,y a point inside that pad or via, vN(x,y) a via of type N, cw(c..) or ccw(c..) an arc to the next point about the centre after c; other vN are vias at no path point)
3.3V: C32.2 C33.2 C34.2 C49.1 D1.1 D3.1 L1.1 L2.1 P1.5 P2.2 P3.2 R1.1 R5.1 R18.2 R27.2 U5.5 U7.18 | length 8425.2
  Top Layer w13: C49.1@3052,-15.1 3119.8,52.7 U7.18@3119.8,89.41 v1(3119.8,235.8)
  Top Layer w15: v1(638.88,319.62) R27.2@638.88,252.98 740.28,354.38 P1.5@1033.68,354.38
  Top Layer w20: v1(240.5,1334.3) D1.1@379.2,1334.3 ; R1.1@630.48,1584.98 675.8,1630.3 1241.06,1630.3 L1.1@1310.08,1561.28 1349.82,1561.28 1380.5,1530.6 1380.5,1272.38 R5.1@1310.08,1272.38
  Top Layer w30: P2.2@-151.4,961.7 -57.5,961.7 R18.2@-57.2,962 ; D1.1@379.2,1334.3 379.2,1535.3 438.78,1594.88 L2.1@514.28,1594.88 620.58,1594.88 R1.1@630.48,1584.98 ; R5.1@1310.08,1272.38 R5.1@1312.93,1269.52 ; v1(1733.28,313.22) D3.1@1733.28,358.38 C32.2@1733.28,425.98 ; v1(1763.28,542.98) C34.2@1732.88,542.98 1732.18,542.28 C33.2@1732.18,485.18 1731.48,484.48 C32.2@1731.48,427.78 C32.2@1733.28,425.98 ; U5.5@1809,411.1 1748.16,411.1 C32.2@1733.28,425.98
  Signal Layer 1 w15: v1@638.5,320 v1(638.88,319.62)
  Signal Layer 1 w20: P2.2@-151.4,961.7 -209.2,903.9 -209.2,523.4 -163.7,477.9 79.8,477.9 237.7,320 v1@638.5,320 ; v1(2921.82,963.92) 3529.82,963.92 P3.2@3529.9,964
  Signal Layer 1 w30: P1.5@1033.68,354.38 1112.86,275.2 1695.26,275.2 v1(1733.28,313.22) ; v1(1763.28,542.98) v1(2921.82,542.98)
  Bottom Layer w13: v1@2922.25,543.05 3119.8,345.5 v1(3119.8,235.8)
  Bottom Layer w20: P2.2@-151.4,961.7 -205.5,1015.8 -205.5,1132.8 -42.2,1296.1 202.3,1296.1 v1(240.5,1334.3) ; v1(2921.82,542.98) v1(2921.82,963.92)
3.3V-M: C15.2 C41.2 C42.2 C43.2 D6.1 R8.1 R11.1 U2.8 U2.13 U6.5 | length 2593.2
  Top Layer w10: v1(1332.8,770.1) 1399.04,770.1 R8.1@1399.58,770.64 1518.44,889.5 1706.52,889.5 C15.2@1738.98,857.04 1739.69,856.32 U2.13@1739.69,794.46 ; v1@1361.46,569.24 R11.1@1398.48,569.24 ; U2.8@1773.2,682.21 1808.19,682.21 v1(1820.4,670)
  Top Layer w20: C15.2@1738.98,857.04 2221.66,857.04 v1@2408.1,670.6
  Top Layer w30: v1@2408.1,670.6 2437.88,640.82 C43.2@2437.88,504.38 2437.48,503.98 U6.5@2437.48,320.18 2500.08,320.18 D6.1@2500.28,320.38
  Signal Layer 1 w10: v1(1361.1,569.6) v1@1361.46,569.24
  Signal Layer 1 w20: v1(1820.4,670) v1(2407.5,670)
  Bottom Layer w10: v1(1332.8,770.1) 1332.8,597.9 v1(1361.1,569.6)
5V: C25.2 C26.2 C29.1 C30.2 C31.2 C39.2 C40.2 D8.1 L3.2 P6.23 R23.2 R26.2 R33.2 U5.1 U6.1 | length 3700.3
  Top Layer w10: 1943.1,69.1 1945,67.2 2188.5,67.2 2198.92,56.78 P6.23@2198.92,23 ; v1@2137.3,323.2 v1@2140.2,323.2
  Top Layer w30: R23.2@1444.28,222.58 1598.39,222.58 L3.2@1633.98,258.16 1863.83,258.16 C29.1@1865.68,260.01 ; U5.1@1921.99,411.1 1979,411.1 C30.2@1996.48,428.58 ; 1943.1,69.1 1865.68,146.52 C29.1@1865.68,260.01 ; R26.2@1995.18,496.68 1995.18,429.88 C30.2@1996.48,428.58 ; R33.2@2252.38,253.28 2252.88,253.78 C40.2@2252.88,327.48 ; v1(2324.49,609.31) U6.1@2324.49,320.18 2260.18,320.18 C40.2@2252.88,327.48 ; v1(2848.8,1601.7) 2931.2,1601.7 D8.1@2933.1,1599.8 ; C29.1@1865.68,260.01 C26.2@1994.54,260.01 ; C26.2@1994.54,260.01 C26.2@2001.28,253.28 2001.68,252.88 C25.2@2074.18,252.88 2074.18,260.08 2137.3,323.2 v1(2142.08,327.98) C39.2@2194.28,327.98 2252.38,327.98 C40.2@2252.88,327.48 ; C26.2@1994.54,260.01 1995.28,260.75 C31.2@1995.28,370.98 1996.48,372.18 C30.2@1996.48,428.58
  Signal Layer 1 w30: v1(2397.2,1601.7) v1(2848.8,1601.7)
  Bottom Layer w30: v1(2324.49,609.31) 2324.49,1008.09 2397.2,1080.8 v1(2397.2,1601.7)
+3.3V: C51.2 R39.1 U7.12 | length 512.4
  Top Layer w13: v1(2949,-80.1) R39.1@2992.1,-80.1 ; v1(2949,291.7) 2949,329.9 C51.2@2943.7,335.2 2993.1,335.2 U7.12@2994.8,333.5
  Signal Layer 1 w13: v1(2949,-80.1) v1(2949,291.7)
ADC: R10.1 R15.2 U1.33 | length 1005.7
  Top Layer w10: v1(350.33,970.13) U1.33@642.35,970.13
  Top Layer w30: v1(350.33,385.43) 350.33,260.47 R10.1@353.2,257.6
  Bottom Layer w30: v1(350.33,385.43) v1(350.33,970.13)
B_L: R50.1 U7.8 | length 433.9
  Top Layer w10: R50.1@2900.8,641.7 2946.32,596.18 2946.32,544.88 2980.4,510.8 3057.88,510.8 3094.8,473.88 U7.8@3094.8,333.5
B_R: R51.1 U7.7 | length 414.9
  Top Layer w10: R51.1@2959.1,642.5 2963.82,637.78 2963.82,563.58 2999.09,528.31 3066.29,528.31 3119.8,474.8 U7.7@3119.8,333.5
BT_RF: R37.1 U7.20 | length 104.6
  Top Layer w13: R37.1@3169.8,-15.2 U7.20@3169.8,89.41
BTAVDD: C47.1 U7.19 | length 118.2
  Top Layer w13: C47.1@3110.8,-14.7 3144.8,19.3 U7.19@3144.8,89.41
DACVDD: C48.2 U7.9 | length 164.8
  Top Layer w13: C48.2@3033.7,483.3 3069.8,447.2 U7.9@3069.8,333.5
EA1: P2.4 U1.23 | length 1352.5
  Top Layer w10: v1(466.4,1293.6) 492.49,1267.51 737.54,1267.51 760.46,1244.59 U1.23@760.46,1186.66
  Signal Layer 1 w30: P2.4@-151.4,761.7 -73.7,839.4 -73.7,1081.9 138,1293.6 v1(466.4,1293.6)
EA2: P2.3 U1.24 | length 1109.5
  Top Layer w10: v1(448,1249.5) 730.3,1249.5 740.77,1239.03 U1.24@740.77,1186.66
  Bottom Layer w30: P2.3@-151.4,861.7 236.4,1249.5 v1(448,1249.5)
EB1: P3.4 U1.92 | length 2334.9
  Top Layer w10: U1.92@1272.27,950.44 v1(1385.84,950.44)
  Signal Layer 1 w30: v1(1385.84,950.44) 2194.66,950.44 2318.6,826.5 3467.4,826.5 P3.4@3529.9,764
EB2: P3.3 U1.93 | length 2316.9
  Top Layer w10: U1.93@1272.27,970.13 1360.93,970.13 v1(1379.4,988.6)
  Signal Layer 1 w30: v1(1379.4,988.6) 2228.6,988.6 2353.2,864 P3.3@3529.9,864